# Altium PCB V0.1.PcbDoc
Units mil, origin at the board's own origin, x right, y up, seen from the top; angles counter-clockwise.
Board outline 6000 x 4000 mil, 2 copper layers (Top Layer, Bottom Layer); 70 components, 0 nets, 230 pads, 51 vias.
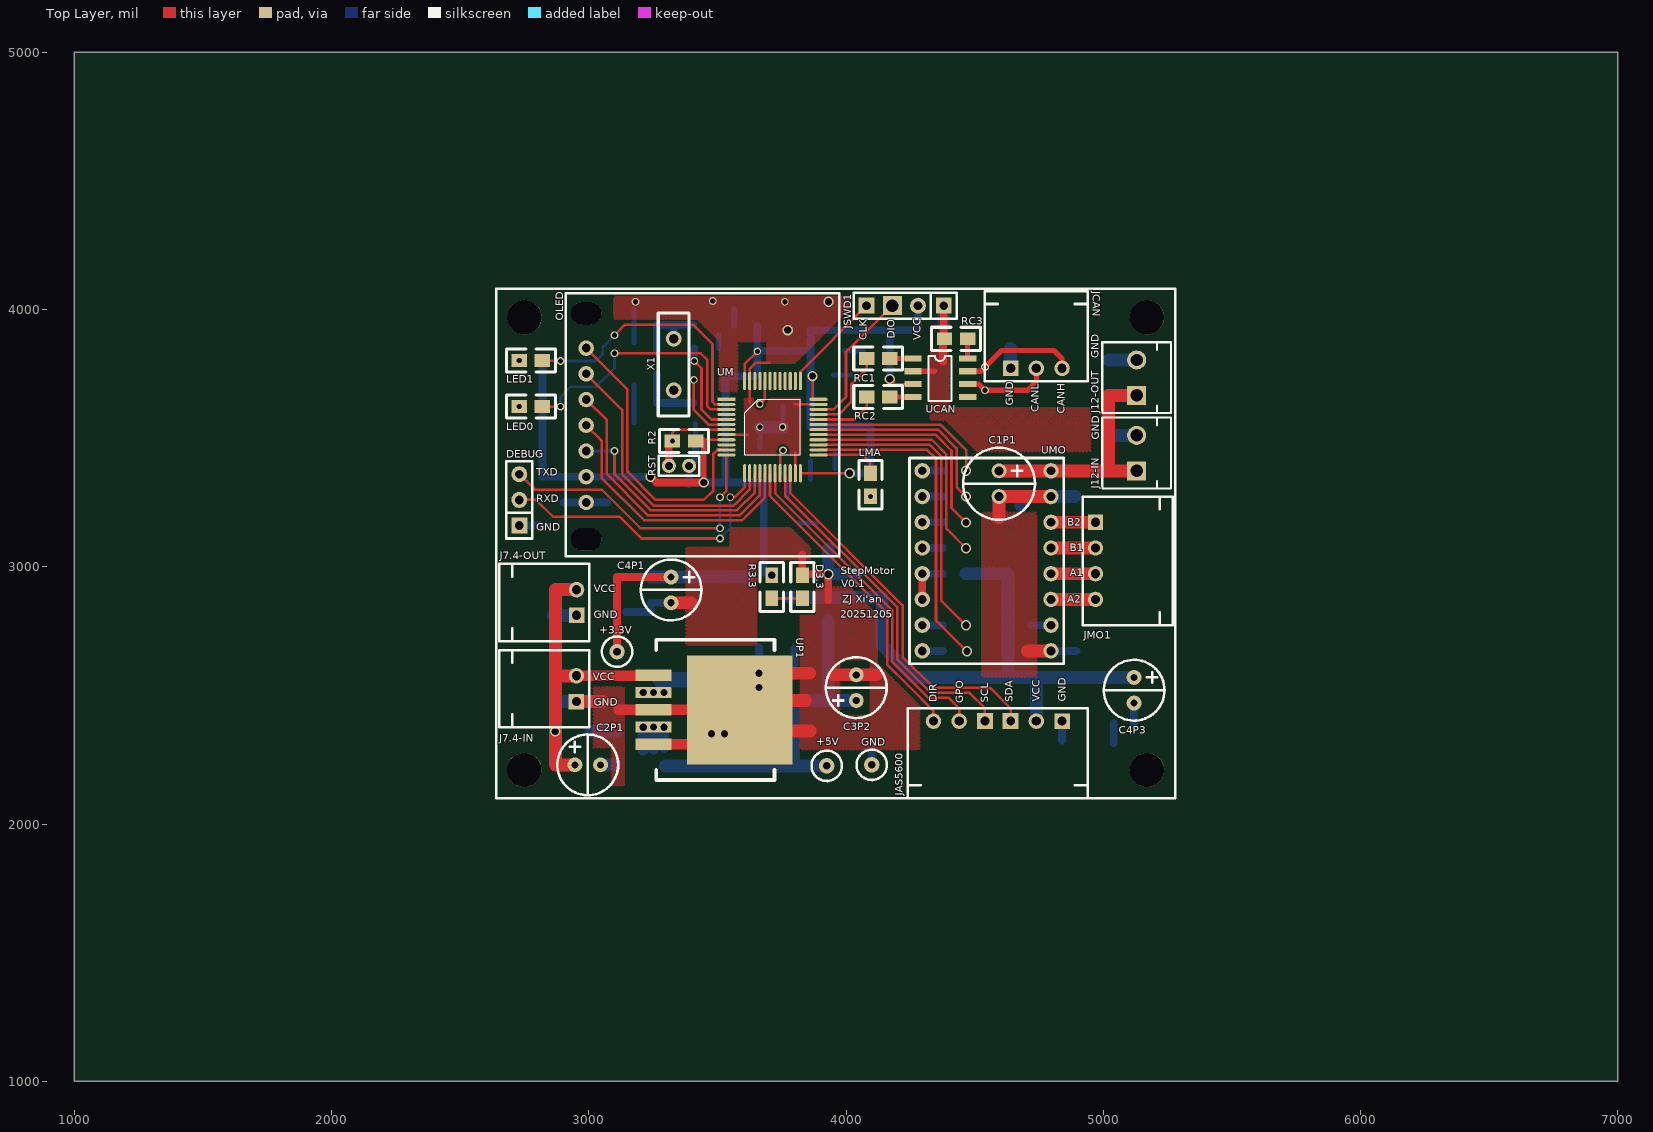
[diagram p0: Top Layer view]
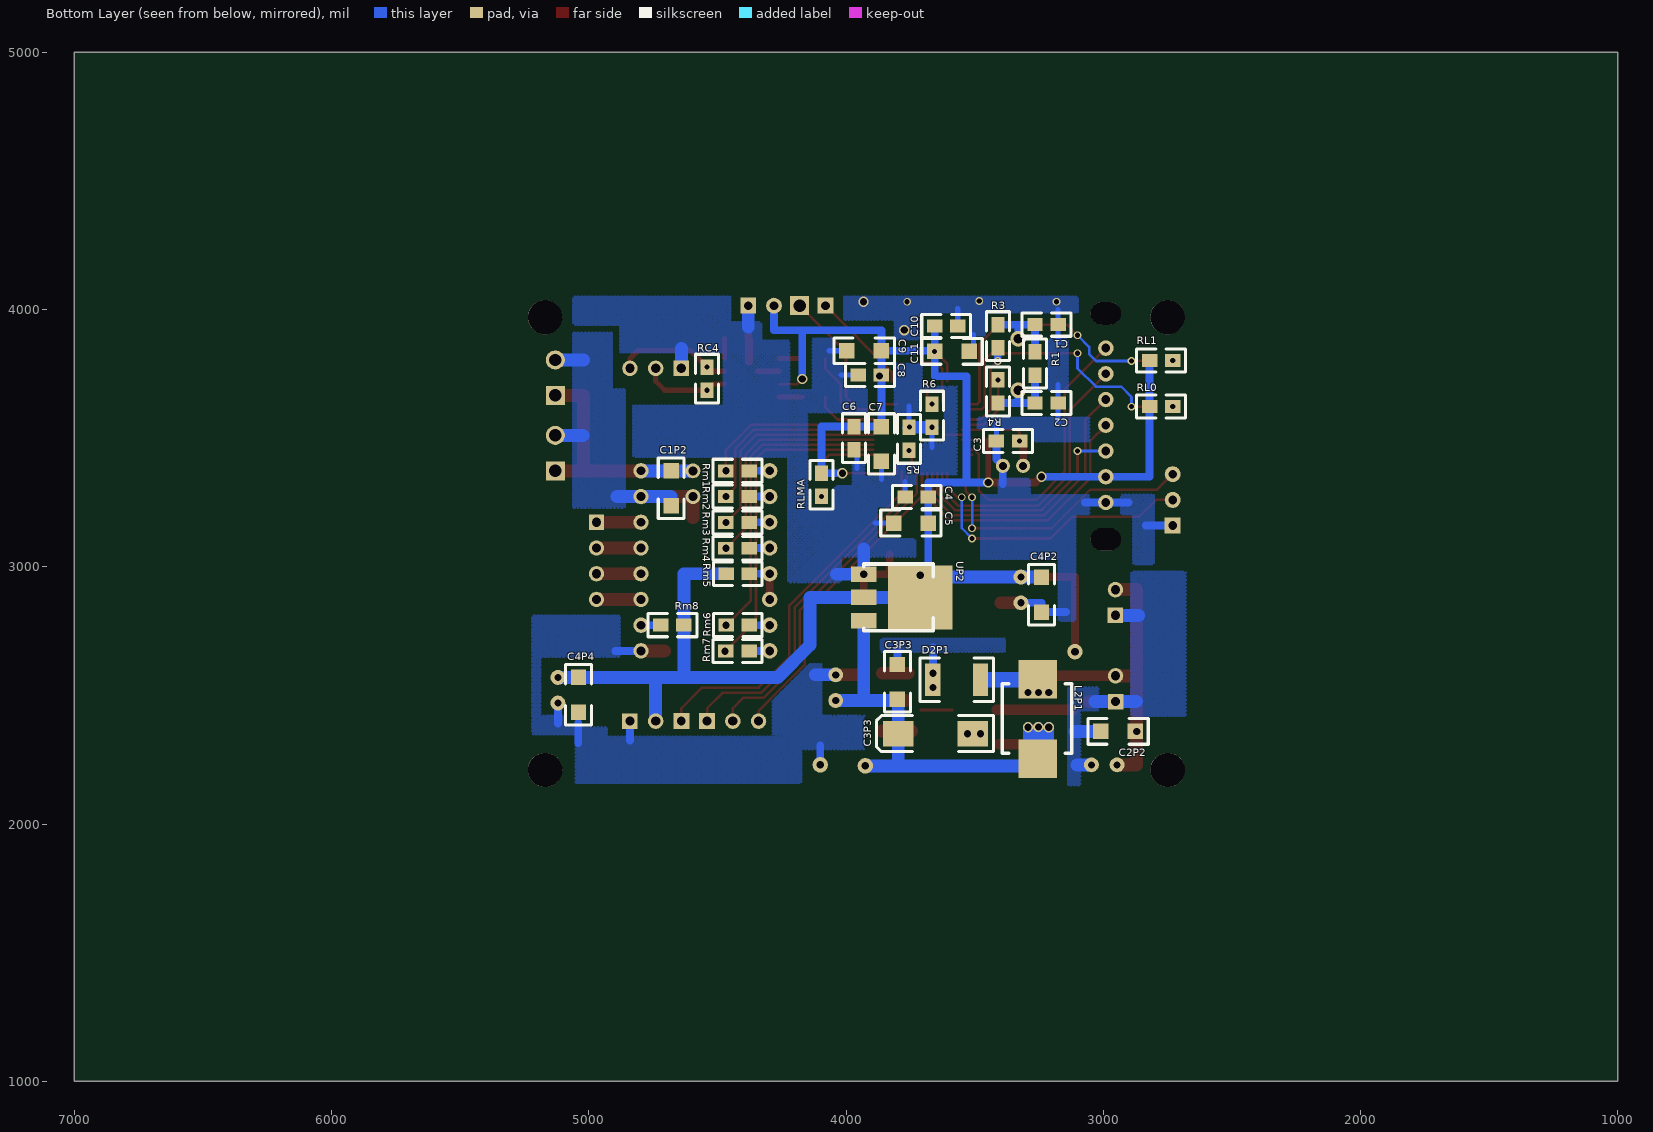
[diagram p1: Bottom Layer view, seen from below]

## Layer stack, top to bottom
Top Solder: solder mask 0.4, Solder Resist, Dk 3.5
Top Layer: signal copper 1.4
Dielectric 1: dielectric 12.6, FR-4, Dk 4.8
Bottom Layer: signal copper 1.4
Bottom Solder: solder mask 0.4, Solder Resist, Dk 3.5

## Board outline
1000,1000 7000,1000 7000,5000 1000,5000

## Design rules (kind name [scope] priority, off if disabled: settings)
Clearance [All] p1: gap=8
PolygonConnect [All] p1: connectstyle=Relief reliefconductorwidth=10 reliefentries=4 polygonreliefangle="90 Angle" airgapwidth=10
RoutingVias [All] p1: holewidth=28 width=50 viastyle="Through Hole" minholewidth=28 minwidth=50 maxholewidth=28 maxwidth=50
SolderMaskExpansion [All] p1: expansion=4
Width [All] p1: maxlimit=10 minlimit=10 preferedwidth=10
30 further rules are at their usual default settings.

## Components (designator, comment, footprint, x,y, rotation, side; value= is the part's Value field where it differs from the comment)
+3.3V "Comment" TestDot#1 3110,2670 r0 top
+5V "Comment" TestDot#2 3925,2226.05 r0 top
C1 "Comment" 0805#1 3175.2,3941.22 r0 bottom
C1P1 "Comment" C+-6mm*12mm 4595,3372.94 r270 top
C1P2 "Comment" 1206#1 4680,3237.94 r90 bottom
C2 "Comment" 0805#1 3175.2,3636.22 r0 bottom
C2P1 "Comment" C+6mm 2946.05,2230 r0 top
C2P2 "Comment" 1206#2 3010,2360 r180 bottom
C3 "Comment" 0805#1 3415.2,3489.14 r180 bottom
C3P2 "Comment" C+6mm 4040,2480 r90 top
C3P3 "Comment" 1206#3 3800,2620 r270 bottom
C3P3 "Comment" 7243 3797.13,2351.04 r0 bottom
C4 "Comment" 0805#2 3770,3271.05 r180 bottom
C4P1 "Comment" C+6mm 3320.2,2960 r270 top
C4P2 "Comment" 1206#4 3240,2823.83 r90 bottom
C4P3 "Comment" C+6mm 5120,2570 r270 top
C4P4 "Comment" 1206#4 5040,2435 r90 bottom
C5 "Comment" 1206#4 3815,3170 r180 bottom
C6 "Comment" 0805#2 3969.13,3455 r90 bottom
C7 "Comment" 1206#4 3862.13,3410 r90 bottom
C8 "Comment" 0805#3 3862.13,3745.22 r0 bottom
C9 "Comment" 1206#5 3862.13,3840 r0 bottom
C10 "Comment" 0805#3 3655.39,3936.22 r180 bottom
C11 "Comment" 1206#5 3655.39,3837.29 r180 bottom
D2P1 "Comment" 1812 3477.13,2561.05 r0 bottom
D3.3 "Comment" 0805#4 3830.2,2876.77 r90 top
DEBUG "Comment" SIP03-2.54 2730,3160 r90 top
GND "Comment" TestDot#3 4100,2230 r0 top
J7.4-IN "Comment" XH2.54W-2P 2952.13,2476.05 r90 top
J7.4-OUT "Comment" XH2.54W-2P 2952.64,2811.05 r90 top
J12-IN "Comment" KF350-2p-3.5 5130,3372.94 r90 top
J12-OUT "Comment" KF350-2p-3.5 5130,3666.17 r90 top
JAS5600 "Comment" XH2.54W-6P 4840,2400 r180 top
JCAN "Comment" XH2.54W-3P 4640,3771.4 r0 top
JMO1 "Comment" XH2.54W-4P 4970,3172.94 r270 top
JSWD1 "Comment" SIP04-2.54 4380,4014.8 r180 top
L2P1 "Comment" 100uH/1A 3252.06,2410 r270 bottom
LED0 "Comment" 0805#5 2820,3622.56 r180 top
LED1 "Comment" 0805#5 2820,3801.56 r180 top
LMA "Comment" 0805#5 4095,3273.82 r90 top
OLED "Comment" 0.96OLED 2990,3985 r270 top
R1 "Comment" 0805#5 3265.2,3745.22 r90 bottom
R2 "Comment" 0805#6 3325.2,3489.14 r0 top
R3 "Comment" 0805#5 3408.66,3851.22 r90 bottom
R3.3 "Comment" 0805#7 3711.26,2876.77 r90 top
R4 "Comment" 0805#5 3408.66,3726.62 r270 bottom
R5 "Comment" 0805#1 3755.2,3542.48 r270 bottom
R6 "Comment" 0805#1 3665.2,3542.48 r90 bottom
RC1 "Comment" 0805#5 4170,3810 r180 top
RC2 "Comment" 0805#5 4170,3660 r180 top
RC3 "Comment" 0805#4 4473,3886.22 r180 top
RC4 "Comment" 0805#5 4540,3686.22 r90 bottom
RL0 "Comment" 0805#6 2730,3622.56 r0 bottom
RL1 "Comment" 0805#6 2730,3801.56 r0 bottom
RLMA "Comment" 0805#6 4095,3273.82 r90 bottom
Rm1 "Comment" 0805#5 4466.89,3372.94 r180 bottom
Rm2 "Comment" 0805#5 4466.89,3272.94 r180 bottom
Rm3 "Comment" 0805#5 4466.89,3171.94 r180 bottom
Rm4 "Comment" 0805#5 4466.89,3071.94 r180 bottom
Rm5 "Comment" 0805#8 4465.89,2972.94 r180 bottom
Rm6 "Comment" 0805#5 4375.89,2772.94 r0 bottom
Rm7 "Comment" 0805#5 4376.89,2672.94 r0 bottom
Rm8 "Comment" 0805#6 4720,2772.94 r180 bottom
RST "Comment" 2p-2mm 3311.46,3392.48 r0 top
UCAN "Comment" SOIC-8 4260,3810 r0 top
UM "Comment" LQFP48 3529.33,3362.96 r0 top
UMO "Comment" motor_drv 4296.89,3372.94 r0 top
UP1 "Comment" LM2596 3522.13,2446.05 r270 top
UP2 "Comment" LM1117 3776.26,2880.88 r270 bottom
X1 "Comment" XTAL 3330.2,3886.22 r270 top

## Footprints (in the part's own frame and the unit in brackets; to place one, negate y for a bottom-side part, rotate by r counter-clockwise, add the part's x,y. Pads: shape width x height; smd on the part's side, far side on the other; paste and mask are expansions set on the pad)
0.96OLED [mil]
  oval 86.61x118.11 hole 86.61 slot 118.11 at 90 deg: 7(0,0) 7(877.95,0)
  round 60 hole 34: CS(135,0) DC(235,0) GND(735,0) RES(335,0) SCL(535,0) SDA(435,0) VCC(635,0)
  silkscreen extent -79,-79 945,984
2p-2mm [mm]
  round 1.4 hole 0.8: 1(0,0) GND(2,0)
  silkscreen extent -1,-1 3,1
100uH/1A [mil]
  rect 150x150 smd: 0(157,-3) 1(-153,-3)
  silkscreen extent -135,-140 135,130
0805#1 [mil]
  rect 60x50 smd: 2(90,0) GND(0,0)
  silkscreen extent -50,-45 140,45
0805#2 [mil]
  rect 60x50 smd: +3.3V(90,0) GND(0,0)
  silkscreen extent -50,-45 140,45
0805#3 [mil]
  rect 60x50 smd: +3.3V(0,0) GND(90,0)
  silkscreen extent -50,-45 140,45
0805#4 [mil]
  rect 60x50 smd: 1(0,0) GND(90,0)
  silkscreen extent -50,-45 140,45
0805#5 [mil]
  rect 60x50 smd: 1(0,0) 2(90,0)
  silkscreen extent -50,-45 140,45
0805#6 [mil]
  rect 60x50 smd: 1(0,0) +3.3V(90,0)
  silkscreen extent -50,-45 140,45
0805#7 [mil]
  rect 60x50 smd: 2(0,0) 3.3V(90,0)
  silkscreen extent -50,-45 140,45
0805#8 [mil]
  rect 60x50 smd: 2(90,0) +3.3V(0,0)
  silkscreen extent -50,-45 140,45
1206#1 [mil]
  rect 60x60 smd: +12V(135,0) GND(0,0)
  silkscreen extent -50,-50 185,50
1206#2 [mil]
  rect 60x60 smd: 2(135,0) GND(0,0)
  silkscreen extent -50,-50 185,50
1206#3 [mil]
  rect 60x60 smd: +5V(135,0) GND(0,0)
  silkscreen extent -50,-50 185,50
1206#4 [mil]
  rect 60x60 smd: +3.3V(135,0) GND(0,0)
  silkscreen extent -50,-50 185,50
1206#5 [mil]
  rect 60x60 smd: +3.3V(0,0) GND(135,0)
  silkscreen extent -50,-50 185,50
1812 [mil]
  rect 60x125 smd: 1(0,0) GND(185,0)
  silkscreen extent -50,-85 235,85
7243 [mil]
  rect 120x100 smd: +5V(0,0) GND(-290,0)
  silkscreen extent -370,-70 85,70
C+6mm [mil]
  round 58 hole 27.56: +(0,0) -(100,0)
  silkscreen extent -68,-118 168,118
C+-6mm*12mm [mil]
  round 58 hole 35: +(0,0) -(100,0)
  silkscreen extent -90,-140 190,140
KF350-2p-3.5 [mil]
  rect 74x74 hole 48: +12V(0,0)
  round 74 hole 48: GND(137.8,0)
  silkscreen extent -69,-134 207,134
LM1117 [mil]
  rect 60x100 smd: +3.3V(0,-155) +VIn(90,-155) GND(-90,-155)
  rect 250x250 smd: Vout(0,65)
  silkscreen extent -130,-155 130,115
LM2596 [mil]
  rect 44x140 smd: +5V(-65,-270) +Vin(-132,-270) FB(69,-270) GND(2,-270) O\N\/OFF(136,-270)
  rect 425x410 smd: GND(3,65)
  silkscreen extent -270,-260 275,200
LQFP48 [mm]
  rect 1.8x0.3 smd: 1(0.149,7.322)
  oval 1.8x0.3 smd: 2(0.149,6.822) 3(0.149,6.322) 4(0.149,5.822) 5(0.149,5.322) 6(0.149,4.822) 7(0.149,4.322) 8(0.149,3.822) 9(0.149,3.322) 10(0.149,2.822) 11(0.149,2.322) 12(0.149,1.822) 25(9.249,1.822) 26(9.249,2.322) 27(9.249,2.822) 28(9.249,3.322) 29(9.249,3.822) 30(9.249,4.322) 31(9.249,4.822) 32(9.249,5.322) 33(9.249,5.822) 34(9.249,6.322) 35(9.249,6.822) 36(9.249,7.322)
  oval 0.3x1.8 smd: 13(1.949,0.022) 14(2.449,0.022) 15(2.949,0.022) 16(3.449,0.022) 17(3.949,0.022) 18(4.449,0.022) 19(4.949,0.022) 20(5.449,0.022) 21(5.949,0.022) 22(6.449,0.022) 23(6.949,0.022) 24(7.449,0.022) 37(7.449,9.122) 38(6.949,9.122) 39(6.449,9.122) 40(5.949,9.122) 41(5.449,9.122) 42(4.949,9.122) 43(4.449,9.122) 44(3.949,9.122) 45(3.449,9.122) 46(2.949,9.122) 47(2.449,9.122) 48(1.949,9.122)
  silkscreen extent 1.95,1.82 7.45,7.32
motor_drv [mil]
  round 60 hole 34: 1(0,0) 2(0,-100) 3(0,-200) 4(0,-300) 5(0,-400) 6(0,-500) 7(0,-600) 8(0,-700) 10(500,-600) 11(500,-500) 12(500,-400) 13(500,-300) 14(500,-200) +(500,0) GND(500,-700) GND(500,-100)
  silkscreen extent -50,-750 550,50
SIP03-2.54 [mil]
  round 62 hole 34: 2(100,0) 3(200,0)
  rect 62x62 hole 34: GND(0,0)
  silkscreen extent -50,-50 250,50
SIP04-2.54 [mil]
  round 62 hole 34: +3.3V(100,0)
  rect 62x62 hole 34: GND(0,0) SWCLK(300,0)
  rect 74x74 hole 48: SWDIO(200,0)
  silkscreen extent -50,-50 350,50
SOIC-8 [mil]
  rect 67x24 smd: 1(0,0) 4(0,-150) 5(213,-150) 6(213,-100) 7(213,-50) 8(213,0) GND(0,-50) VCC(0,-100)
  silkscreen extent 60,-165 150,10
TestDot#1 [mil]
  round 60 hole 30: +3.3V(0,0)
  silkscreen extent -59,-59 59,59
TestDot#2 [mil]
  round 60 hole 30: +5V(0,0)
  silkscreen extent -59,-59 59,59
TestDot#3 [mil]
  round 60 hole 30: GND(0,0)
  silkscreen extent -59,-59 59,59
XH2.54W-2P [mil]
  round 60 hole 36: 2(100,0)
  rect 60x60 hole 36: GND(0,0)
  silkscreen extent -100,-50 200,300
XH2.54W-3P [mil]
  round 60 hole 36: 2(100,0) 3(200,0)
  rect 60x60 hole 36: GND(0,0)
  silkscreen extent -100,-50 300,300
XH2.54W-4P [mil]
  rect 60x60 hole 36: 1(0,0)
  round 60 hole 36: 2(100,0) 3(200,0) 4(300,0)
  silkscreen extent -100,-50 400,300
XH2.54W-6P [mil]
  round 60 hole 36: +3.3V(100,0) DIR(500,0) GPO(400,0)
  rect 60x60 hole 36: GND(0,0)
  rect 62x62 hole 34: SCK(300,0) SDA(200,0)
  silkscreen extent -100,-50 600,300
XTAL [mil]
  round 62 hole 35.43: 1(0,0) 2(200,0)
  silkscreen extent -100,-60 300,60

## Free pads (board coordinates)
  round 133.86 hole 133.86: 2(2750,2210) 2(2750,3970) 2(5170,2210) 2(5170,3970)

## Via types
v1: diameter 40, hole 28, Top Layer to Bottom Layer, 26 vias
v2: diameter 30, hole 20, Top Layer to Bottom Layer, 25 vias

## Nets (pads, with @x,y where several pads share a name; then routed paths per layer and width w, separated by ;. In a path a pad name is that pad's centre, name@x,y a point inside that pad or via, vN(x,y) a via of type N, cw(c..) or ccw(c..) an arc to the next point about the centre after c; other vN are vias at no path point)
pads on no net: +3.3V.+3.3V +5V.+5V C1.2 C1.GND C1P1.+ C1P1.- C1P2.+12V C1P2.GND C2.2 C2.GND C2P1.+ C2P1.- C2P2.2 C2P2.GND C3.2 C3.GND C3P2.+ C3P2.- C3P3.+5V C3P3.GND C4.+3.3V C4.GND C4P1.+ C4P1.- C4P2.+3.3V C4P2.GND C4P3.+ C4P3.- C4P4.+3.3V C4P4.GND C5.+3.3V C5.GND C6.+3.3V C6.GND C7.+3.3V C7.GND C8.+3.3V C8.GND C9.+3.3V C9.GND C10.+3.3V C10.GND C11.+3.3V C11.GND D2P1.1 D2P1.GND D3.3.1 D3.3.GND DEBUG.2 DEBUG.3 DEBUG.GND GND.GND J7.4-IN.2 J7.4-IN.GND J7.4-OUT.2 J7.4-OUT.GND J12-IN.+12V J12-IN.GND J12-OUT.+12V J12-OUT.GND JAS5600.+3.3V JAS5600.DIR JAS5600.GND JAS5600.GPO JAS5600.SCK JAS5600.SDA JCAN.2 JCAN.3 JCAN.GND JMO1.1 JMO1.2 JMO1.3 JMO1.4 JSWD1.+3.3V JSWD1.GND JSWD1.SWCLK JSWD1.SWDIO L2P1.0 L2P1.1 LED0.1 LED0.2 LED1.1 LED1.2 LMA.1 LMA.2 OLED.7 OLED.CS OLED.DC OLED.GND OLED.RES OLED.SCL OLED.SDA OLED.VCC R1.1 R1.2 R2.1 R2.+3.3V R3.1 R3.2 R3.3.2 R3.3.3.3V R4.1 R4.2 R5.2 R5.GND R6.2 R6.GND RC1.1 RC1.2 RC2.1 RC2.2 RC3.1 RC3.GND RC4.1 RC4.2 RL0.1 RL0.+3.3V RL1.1 RL1.+3.3V RLMA.1 RLMA.+3.3V Rm1.1 Rm1.2 Rm2.1 Rm2.2 Rm3.1 Rm3.2 Rm4.1 Rm4.2 Rm5.2 Rm5.+3.3V Rm6.1 Rm6.2 Rm7.1 Rm7.2 Rm8.1 Rm8.+3.3V RST.1 RST.GND UCAN.1 UCAN.4 UCAN.5 UCAN.6 UCAN.7 UCAN.8 UCAN.GND UCAN.VCC UM.1 UM.2 UM.3 UM.4 UM.5 UM.6 UM.7 UM.8 UM.9 UM.10 UM.11 UM.12 UM.13 UM.14 UM.15 UM.16 UM.17 UM.18 UM.19 UM.20 UM.21 UM.22 UM.23 UM.24 UM.25 UM.26 UM.27 UM.28 UM.29 UM.30 UM.31 UM.32 UM.33 UM.34 UM.35 UM.36 UM.37 UM.38 UM.39 UM.40 UM.41 UM.42 UM.43 UM.44 UM.45 UM.46 UM.47 UM.48 UMO.1 UMO.2 UMO.3 UMO.4 UMO.5 UMO.6 UMO.7 UMO.8 UMO.10 UMO.11 UMO.12 UMO.13 UMO.14 UMO.+ UMO.GND UP1.+5V UP1.+Vin UP1.FB UP1.GND UP1.O\N\/OFF UP2.+3.3V UP2.+VIn UP2.GND UP2.Vout X1.1 X1.2
copper on no net: | length 45722.2
  Top Layer w10: 2730,3260 2795,3260 2860,3195 3120.2,3195 3205.2,3110 v2(3510,3110) ; 2730,3360 2790.32,3299.68 3050.51,3299.68 3200.2,3150 v2(3510,3150) ; 2820,3622.56 v2(2890,3622.56) ; 2820,3801.56 v2@2888.44,3801.56 ; 2990,3550 3050,3490 3050,3345.83 3215.83,3180 3594.8,3180 3684.8,3270 3684.8,3363.82 ; 2990,3650 3070,3570 3070,3360 3230,3200 3586.06,3200 3665.12,3279.06 3665.12,3363.82 ; 2990,3850 3150,3690 3150,3370 3260,3260 3447.05,3260 3484.31,3297.27 3484.31,3439 3499.68,3454.37 3535.2,3454.37 ; 3011.54,3750 2990,3750 3130,3610 3130,3360 3252.06,3237.94 3564,3237.94 3625.75,3299.68 3625.75,3363.82 ; v2(3100,3450) 3100,3360 3240,3220 3576.86,3220 3645.43,3288.57 3645.43,3363.82 ; v2(3100,3830) 3435,3830 3460,3805 3460,3625 3473.15,3611.85 3535.2,3611.85 ; v2(3100,3900) 3141.22,3941.22 3405.37,3941.22 3481.06,3865.53 3481.06,3641.61 3491.14,3631.54 3535.2,3631.54 ; v2(3325.2,3489.14) 3325.2,3521.48 3336.91,3533.19 3548.43,3533.19 ; v2(3408.66,3726.62) 3408.66,3609.3 3465.16,3552.8 3535.2,3552.8 ; v2(3410,3800) 3438.31,3771.69 3438.31,3611.85 3477.68,3572.48 3535.2,3572.48 ; 3419.88,3493.82 3548.43,3493.82 ; v2(3510,3270) 3535.2,3295.2 3535.2,3434.69 3510,3434.69 ; 3535.2,3513.43 3617.64,3513.43 ; v2(3550,3270) 3567.06,3270 3606.06,3309 3606.06,3363.82 ; 3587.13,2443.05 3709.43,2443.05 ; 3606.06,3722.09 3606.06,3787.96 v2(3655.39,3837.29) ; 3625.75,3639.89 3625.75,3722.09 3625.75,3769.49 3648.85,3792.6 3702.73,3792.6 ; v2(3665.2,3632.48) 3684.8,3652.09 3684.8,3722.09 ; 3704.49,3363.82 3704.49,3275.51 4160,2820 4160,2620 4240,2540 4340,2440 4340,2400 ; 3711.26,2876.77 3830.2,2876.77 ; 3724.17,3363.82 3724.17,3285.83 4180,2830 4180,2630 4320,2490 4400,2490 4440,2450 4440,2400 ; 3743.86,3363.82 3743.86,3441.15 v2(3755.2,3452.48) ; 3763.54,3353.51 3763.54,3277.5 4200,2841.05 4200,2640 4330,2510 4480,2510 4540,2450 4540,2400 ; 3783.23,3370 3783.23,3286.77 4220,2850 4220,2650 4340,2530 4560,2530 4640,2450 4640,2400 ; 3801.24,3631.54 3893.46,3631.54 ; 3802.91,3363.82 3802.91,3443.53 ; 3822.6,3363.82 v1(4014.13,3363.82) ; 3822.6,3722.09 3822.6,3757.4 4080,4014.8 ; 3870,3651.22 v1(3870,3741.16) ; 3893.46,3434.69 4065.31,3434.69 4095,3405 4095,3363.82 ; 3893.46,3454.37 4315.63,3454.37 4350,3420 4350,2791.94 4469,2672.94 v1(4470,2671.94) ; 3893.46,3474.14 4325.86,3474.14 4370,3430 4370,2868.83 4466.39,2772.44 v1(4466.89,2772.44) ; 3893.46,3493.74 4333.46,3493.74 4390,3437.2 4390,3148.83 v1(4466.89,3071.94) ; 3893.46,3513.43 4347.52,3513.43 4410,3450.94 4410,3228.83 v1(4466.89,3171.94) ; 3893.46,3533.19 4356.81,3533.19 4430,3460 4430,3309.83 v1(4466.89,3272.94) ; 3893.46,3552.8 4367.2,3552.8 4466.89,3453.11 v1(4466.89,3372.94) ; 3893.46,3572.48 4032.48,3572.48 4080,3620 4080,3660 ; 3893.46,3592.17 3972.17,3592.17 4020,3640 4020,3709.41 4080,3769.41 4080,3810 ; 3893.46,3611.85 3951.85,3611.85 4000,3660 4000,3834.8 4180,4014.8 ; v1(4170,3730) 4190,3710 4260,3710 ; 4740,3750 4740,3771.4
  Top Layer w20: v1(3447.05,3327.94) 3447.05,3492.48 ; 4170,3660 4260,3660 ; 4170,3810 4260,3810 ; 4260,3760 4343.44,3760 ; 4473,3710 4516.22,3710 v2(4540,3686.22) 4704.83,3686.22 4740,3721.4 4740,3771.4 ; 4473,3760 4523.78,3760 v2(4540,3776.22) 4605,3841.22 4808.78,3841.22 4840,3810 4840,3771.4 ; 4473,3810 4473,3886.22
  Top Layer w30: 3109.23,2960 3320.2,2960 ; 3110,2670 3110,2960 ; v1(3240,3350) 3262.06,3327.94 v1(3447.05,3327.94) ; 3311.46,3392.48 v2@3311.46,3489.02 ; 3830.2,2966.77 3830.2,3047.62 ; 3836.28,2970.88 v1(3931.26,2970.88) 3931.26,2871.11 ; 4296.89,2871.94 4296.89,2971.94 ; 4376.99,3797.16 4376.99,3886.22 ; 4380,3889.22 4380,4014.8
  Top Layer w40: 2952.13,2576.05 3250.13,2576.05 ; 3115.27,2444.05 3252.13,2444.05 3415.13,2444.05 ; 3252.13,2310.05 3406.13,2310.05
  Top Layer w50: 2870,2576.05 2952.13,2576.05 ; 2946.05,2230 2870,2230 2870,2911.05 2952.64,2911.05 ; 2952.13,2476.05 3055.87,2476.05 ; 3320.2,2860 3397.4,2860 ; 3744.88,2361.74 3860.8,2361.74 ; 3758.21,2586.02 3858.81,2586.02 ; 3767.81,2480 3841.53,2480 ; 3951.79,2580 4040,2580 4118.02,2580 ; 4595,3190.78 4595,3272.94 4695.73,3272.94 4796.89,3272.94 ; 4595,3372.94 4796.89,3372.94 5130,3372.94 ; 4704.89,2672.94 4796.89,2672.94 ; 4796.89,2872.94 4970,2872.94 ; 4796.89,2972.94 4970,2972.94 ; 4796.89,3072.94 4970,3072.94 ; 4796.89,3172.94 4970,3172.94 ; 5020,3372.94 5020,3666.17 5130,3666.17
  Bottom Layer w10: v2(2890,3622.56) 2890,3660 2930,3700 3028.78,3700 3100,3771.22 v2(3100,3830) ; v2(2890,3800) 3027.52,3800 3055,3827.48 3055,3855 v2(3100,3900) ; 2990,3450 v2(3100,3450) ; 3292.13,2221.05 3297.13,2226.05 ; v2(3510,3110) 3550,3150 v2(3550,3270) ; v2(3510,3150) v2(3510,3270)
  Bottom Layer w20: 3175.2,3560.89 3175.2,3636.22 3175.2,3707.4 ; 3175.2,3871.84 3175.2,3941.22 3175.2,3999.4 ; 3415.2,3489.14 3415.2,3556.62 ; 3504.02,3846.76 3504.02,3902.85 ; 3565.39,3936.22 3565.39,4003.8 ; 3665.2,3463.94 v2(3665.2,3542.48) ; v2@3755.2,3542.48 3755.2,3624.33 ; 3770,3271.05 3770,3331.59 ; 3815,3170 3886.92,3170 ; 3862.13,3338.87 3862.13,3410 ; 3952.13,3745.22 4018.81,3745.22 ; 3957.54,3382.22 3957.54,3441.69 ; 3997.13,3840 4066.28,3840
  Bottom Layer w30: 2730,3160 2834.73,3160 ; 2820,3801.56 2820,3622.56 2820,3350 2990,3350 v1(3240,3350) ; 2901.83,3250 2990,3250 3071.53,3250 ; 3145.04,2823.83 3240,2823.83 3240,2860 3320.2,2860 ; 3265.2,3636.22 3265.2,3745.22 ; 3265.2,3835.22 3265.2,3941.22 3408.66,3941.22 ; 3265.59,3636.62 3408.66,3636.62 ; 3330.2,3641.62 3330.2,3686.22 ; 3330.2,3886.22 3330.2,3936.22 ; 3390.2,3321.73 3390.2,3392.48 3415.2,3417.48 3415.2,3489.14 ; v2(3410,3800) 3410,3849.89 ; v1(3447.05,3327.94) 3680,3327.94 3680,3271.05 3680,3170 3680,2976.74 ; 3531.16,3327.94 3531.16,3741.16 3655.39,3741.16 v2(3655.39,3837.29) ; v2@3655.39,3826.22 3655.39,3936.22 ; v2@3656.56,3840 3862.13,3840 ; v1(3662.13,2586.05) 3662.13,2686.46 ; 3800,2620 3800,2680 ; v1(4014.13,3363.82) 4100,3363.82 ; 4095,3356.38 4095,3540 ; 4095,3545 3969.13,3545 3862.13,3545 3862.13,3745.22 3862.13,3840 ; 4100,2230 4100,2306.39 ; v1(4170,3730) 4170,3920 ; 4280,4014.8 4280,3920 3862.13,3920 3862.13,3840 ; 4296.89,2672.94 4376.89,2672.94 ; 4296.89,2772.94 4375.89,2772.94 ; 4296.89,2972.94 4375.89,2972.94 ; 4296.89,3072.94 4375.89,3072.94 ; 4296.89,3172.94 4375.89,3172.94 ; 4296.89,3272.94 4376.89,3272.94 ; 4296.89,3372.94 4376.89,3372.94 ; 4720,2772.94 4796.89,2772.94 ; 4796.89,2672.94 4896.92,2672.94 ; 4840,2324.77 4840,2400 ; 5041.09,2315 5041.09,2393.67 ; 5120,2390.57 5120,2470
  Bottom Layer w40: 3212.13,2286.05 v1(3212.13,2376.05) ; 3252.13,2291.05 v1(3252.13,2377.05) ; 3292.13,2296.05 v1(3292.13,2376.05)
  Bottom Layer w50: 2862.04,2811.05 2952.64,2811.05 ; 2870.32,2476.05 2952.13,2476.05 3031.48,2476.05 ; 3010,2360 3109.53,2360 ; 3046.05,2230 3101.59,2230 ; 3241.17,2960 3320.2,2960 3615,2960 ; 3297.13,2226.05 3797.13,2226.05 ; v2(3665.2,3542.48) v2@3755.2,3542.48 ; 3783.23,2880.88 3931.26,2880.88 4140,2880.88 4140,2695.75 4265.75,2570 4630,2570 ; 3925,2226.05 3797.13,2226.05 ; 3931.26,2481.26 3931.26,2790.88 ; 3931.26,3069.1 v1(3931.26,2970.88) 4036.38,2970.88 ; 4040,2480 3800,2480 3797.13,2477.13 3797.13,2351.05 3797.13,2226.05 ; 4040,2580 4118.02,2580 ; 4380,3931 4380,4014.8 ; 4465.89,2972.94 4630,2972.94 4630,2772.94 4630,2570 ; 4595,3372.94 4680,3372.94 4796.89,3372.94 ; 4640,3771.4 4640,3848.04 ; 4680,3237.94 4680,3272.94 4796.89,3272.94 4890,3272.94 ; 4740,2400 4740,2570 ; 5020.73,3803.96 5130,3803.96 ; 5022.69,3510.73 5130,3510.73 ; 5120,2570 5040,2570 4630,2570
  Bottom Layer w60: 3277.13,2561.05 3477.13,2561.05
  other v1: 3477.13,2351.05 3527.13,2351.05 2870,2360 3212.13,2511.05 3252.13,2511.05 3292.13,2511.05 3662.13,2531.05 3711.26,2966.77 3773.32,3920 3932.02,4030
  other v2: 4095,3273.82 3753.71,3543.63 2730,3622.56 2730,3801.56 3181.47,4030 3762.31,4030 3481.84,4033.38

## Polygon pours and split planes (outlines as drawn)
no net on Top Layer "Bottom Layer-No Net" (hatched 45Degree grid 10 track 10, pour order 94): 3550,3150 3682.3,3150 3783.36,3150 3860,3073.36 3860,3028.8 3651.72,3028.8 3650.52,3030 3650.86,3029.66 3650.86,2696.14 3380,2696.14 3379.23,2696.91 3379.23,3060 3380,3060.77 3380,3072.94 3549,3072.94 3550,3071.94 3550.59,3072.53 3550.59,3150
no net on Top Layer "Bottom Layer-No Net" (hatched 45Degree grid 10 track 10, pour order 90): 3510,3876.86 3510,3682.3 3576.45,3682.3 3576.86,3682.72 3577.05,3682.9 3577.05,3890 3522.3,3890 3509.58,3877.28
no net on Top Layer "Bottom Layer-No Net" (hatched 45Degree grid 10 track 10, pour order 88): 3100,4050 4006.17,4050 4006.17,3998.28 3800.5,3792.6 3693.2,3792.6 3693.2,3873.72 3696.34,3876.86 3510,3876.86 3422.24,3964.62 3100,3964.62 3100,4050
no net on Top Layer "Bottom Layer-No Net" (hatched 45Degree grid 10 track 10, pour order 86): 4330,3830 4400,3830 4400,3616.16 4947.72,3616.16 4950,3613.88 4950,3450 4510,3450 4390,3570 4330,3570 4330,3830
no net on Top Layer "Bottom Layer-No Net" (hatched 45Degree grid 10 track 10, pour order 84): 4530,3210 4530,2572.77 4740,2572.77 4740,3210 4530,3210
no net on Top Layer "Bottom Layer-No Net" (hatched 45Degree grid 10 track 10, pour order 80): 3020,2531.05 3135.55,2531.05 3135.55,2150 3090,2150 3090,2298.04 3020,2298.04 3020,2531.05
no net on Top Layer "Bottom Layer-No Net" (hatched 45Degree grid 10 track 10, pour order 76): 4096.81,2610 4096.81,2639.83 4096.64,2640 4119.94,2640 4119.94,2623.97 4135.63,2608.28 4133.91,2606.56 4096.81,2606.56 4096.81,2610
no net on Top Layer "Bottom Layer-No Net" (hatched 45Degree grid 10 track 10, pour order 74): 3823.38,2639.57 3823.38,2290.43 3823.81,2290 4284.04,2290 4284.04,2459.87 4133.91,2610 4096.81,2610 4096.81,2420 3972.84,2420 3972.84,2636.52 3969.36,2640 3823.81,2640
no net on Top Layer "Bottom Layer-No Net" (hatched 45Degree grid 10 track 10, pour order 72): 3886.92,2920 4012.65,2920 4121.6,2811.05 4120,2809.44 4120,2640 3823.81,2640 3823.38,2639.57 3823.38,2809.28 3886.92,2809.28 3886.92,2920
no net on Top Layer "Bottom Layer-No Net" (hatched 45Degree grid 10 track 10, pour order 30): 3606.06,3652.09 3606.06,3434.69 3822.6,3434.69 3822.6,3652.09 3606.06,3652.09
no net on Bottom Layer "Bottom Layer-No Net" (hatched 45Degree grid 10 track 10, pour order 96): 3405.6,3278.32 3405.6,3341.53 3405.37,3341.77 3404.67,3341.07 3286.32,3341.07 3286.32,3281.11 3283.58,3278.37 3283.63,3278.32 3405.6,3278.32
no net on Bottom Layer "Bottom Layer-No Net" (hatched 45Degree grid 10 track 10, pour order 78): 4170.9,2290 3930.49,2290 3930.49,2416.3 3930,2416.79 3929.82,2416.97 3929.82,2420 4096.81,2420 4096.81,2620.7 4138.28,2620.7 4140,2622.42 4284.04,2478.38 4284.04,2346.57 4227.47,2346.57 4170.9,2290
no net on Bottom Layer "Bottom Layer-No Net" (hatched 45Degree grid 10 track 10, pour order 68): 4880,2650 5188.47,2650 5188.47,2420 5220,2420 5220,2810 4880.13,2810 4880.13,2650.13 4880,2650
no net on Bottom Layer "Bottom Layer-No Net" (hatched 45Degree grid 10 track 10, pour order 66): 4173.49,2340 4173.49,2160 5050,2160 5050,2330 5050,2350 5220,2350 5220,2420 5100,2420 5100,2376.05 4930.01,2376.05 4930.01,2322.96 4927.06,2320 4927.06,2340 4173.49,2340
no net on Bottom Layer "Bottom Layer-No Net" (hatched 45Degree grid 10 track 10, pour order 64): 3020,2531.05 3020,2441.59 3083.38,2441.59 3085.52,2439.45 3092.07,2439.45 3090,2437.38 3090,2150 3135.55,2150 3135.55,2531.05 3020,2531.05
no net on Bottom Layer "Bottom Layer-No Net" (hatched 45Degree grid 10 track 10, pour order 62): 3383.49,2669.64 3864.29,2669.64 3864.29,2719.37 3864.56,2719.64 3864.27,2719.93 3383.49,2719.93 3383.49,2669.64
no net on Bottom Layer "Bottom Layer-No Net" (hatched 45Degree grid 10 track 10, pour order 60): 3055,3278.46 3055,3205.21 3109.23,3205.21 3109.23,2790 3173.23,2790 3173.19,2790.04 3173.19,3030.41 3475.02,3030.41 3475.02,3278.3
no net on Bottom Layer "Bottom Layer-No Net" (hatched 45Degree grid 10 track 10, pour order 58): 2804.13,3280 2804.13,3010 2883.3,3010 2883.3,3205.21 2930,3205.21 2930,3280 2804.13,3280
no net on Bottom Layer "Bottom Layer-No Net" (hatched 45Degree grid 10 track 10, pour order 56): 2680,2980 2680,2420 2890,2420 2890,2980 2680,2980
no net on Bottom Layer "Bottom Layer-No Net" (hatched 45Degree grid 10 track 10, pour order 54): 3055,3580 3487.76,3580 3487.76,3539.48 3265.2,3539.48 3265.2,3489.44 3264.91,3489.16 3263.48,3487.72 3055,3487.72 3055,3580
no net on Bottom Layer "Bottom Layer-No Net" (hatched 45Degree grid 10 track 10, pour order 52): 3137.64,3883.74 3212.18,3883.74 3212.18,3690.06 3212.13,3690 3210.59,3688.47 3137.64,3688.47 3137.64,3883.74
no net on Bottom Layer "Bottom Layer-No Net" (hatched 45Degree grid 10 track 10, pour order 50): 4006.17,4050 4006.17,3960 3809.41,3960 3810,3959.41 3810,3883.74 3720.75,3883.74 3718.29,3886.2 3718.29,3990 3510,3990 3510,3900 3460.72,3900 3460,3900.72 3460,3990 3100,3990 3100,4050 4006.17,4050
no net on Bottom Layer "Bottom Layer-No Net" (hatched 45Degree grid 10 track 10, pour order 48): 3615,3700 3704.14,3700 3706.33,3702.19 3706.33,3790 3809.41,3790 3810,3790.59 3810,3603.62 3720.48,3603.62 3720.48,3685.75 3720.48,3686.22 3611.12,3686.22 3610,3687.34 3614.6,3691.94 3614.6,3699.6
no net on Bottom Layer "Bottom Layer-No Net" (hatched 45Degree grid 10 track 10, pour order 46): 3800,3359.47 3800,3395.21 3700,3395.21 3700,3480 3615,3480 3615,3700 3614.6,3699.6 3570,3699.6 3570,3359.47 3730,3359.47 3730,3320 3800.83,3320 3800.01,3320.82 3800.01,3360
no net on Bottom Layer "Bottom Layer-No Net" (hatched 45Degree grid 10 track 10, pour order 44): 4041.97,3233.65 4041.97,3313.21 3966.04,3313.21 3972.84,3313.21 3972.84,3400.47 3930,3400.47 3930,3349 3931.26,3347.74 3929,3350 3730,3350 3730,3320 3830,3320 3830,3234.6 3880,3234.6 3880,3107.05 3730,3107.05 3730,3040 4016.93,3040 4020,3036.93 4041.97,3058.9 4041.97,3234.6
no net on Bottom Layer "Bottom Layer-No Net" (hatched 45Degree grid 10 track 10, pour order 42): 4050,3886.22 4050.02,3886.2 4130,3886.2 4130,3693.78 4130,3686.22 4219.23,3686.22 4220,3685.45 4224.55,3680.9 4224.55,2940 4020,2940 4020,3220 4160,3220 4150,3220 4150,3603.36 4146.64,3600 3920,3600 3920,3690 4014.13,3690 4014.13,3778.63 4050,3778.63 4050,3886.58
no net on Bottom Layer "Bottom Layer-No Net" (hatched 45Degree grid 10 track 10, pour order 38): 4220,3834.8 4220,3427.29 4827.82,3427.29 4827.82,3625.28 4474.26,3625.28 4474.26,3845.57 4224.55,3845.57 4220,3841.02 4220,3834.8
no net on Bottom Layer "Bottom Layer-No Net" (hatched 45Degree grid 10 track 10, pour order 36): 4906.22,4050 5060,4050 5060,3941.22 4879.16,3941.22 4877.94,3940 4877.94,3834.8 4220,3834.8 4220,3877.83 4327.83,3877.83 4330,3880 4330,3950 4450,3950 4450,4050 4906.22,4050
no net on Bottom Layer "Bottom Layer-No Net" (hatched 45Degree grid 10 track 10, pour order 32): 4860,3230 4860,3690 4910,3690 4910,3910 5060,3910 5060,3230 4860,3230

## Silkscreen, mask and mechanical layers (free items; w line width, h text height)
Top Overlay:
  lines w10: 2640,2099.92 2640,4080 5280,4080 5280,2099.92 2640,2099.92
  text "DIO" at 4190,3886.22 h30 r90
  text "CLK" at 4080,3880 h30 r90
  text "VCC" at 4290,3880 h30 r90
  text "GND" at 4981.79,3810 h30 r90
  text "GND" at 4650,3626.22 h30 r90
  text "CANL" at 4750,3600 h30 r90
  text "CANH" at 4850,3594.33 h30 r90
  text "GND" at 4985,3493.74 h30 r90
  text "TXD" at 2795,3353.51 h30
  text "RXD" at 2795,3250 h30
  text "B2" at 4860,3160 h30
  text "GND" at 2795,3140 h30
  text "B1" at 4870,3060 h30
  text "StepMotor" at 3980,2970.88 h30
  text "A1" at 4870,2962.94 h30
  text "V0.1" at 3981.36,2920 h30
  text "VCC" at 3020,2900 h30
  text "ZJ Xi'an" at 3985,2859.79 h30
  text "A2" at 4860,2860 h30
  text "20251205" at 3977.89,2802.53 h30
  text "GND" at 3020,2800 h30
  text "VCC" at 3016.22,2558.25 h30
  text "GND" at 4855,2475.9 h30 r90
  text "VCC" at 4752.44,2475 h30 r90
  text "SDA" at 4649.01,2473.93 h30 r90
  text "DIR" at 4352.03,2473.17 h30 r90
  text "GPO" at 4455,2469.87 h30 r90
  text "SCL" at 4553.09,2470.47 h30 r90
  text "GND" at 3020,2460 h30
Mechanical 1:
  circle w10: c70.51,2269.39 r43.31
  circle w10: c70.51,3159.16 r43.31